# Altium PCB 111.PcbDoc
Units mil, origin at the board's own origin, x right, y up, seen from the top; angles counter-clockwise.
Board outline 6000 x 4000 mil, 2 copper layers (Top Layer, Bottom Layer); 27 components, 29 nets, 115 pads, 117 vias.
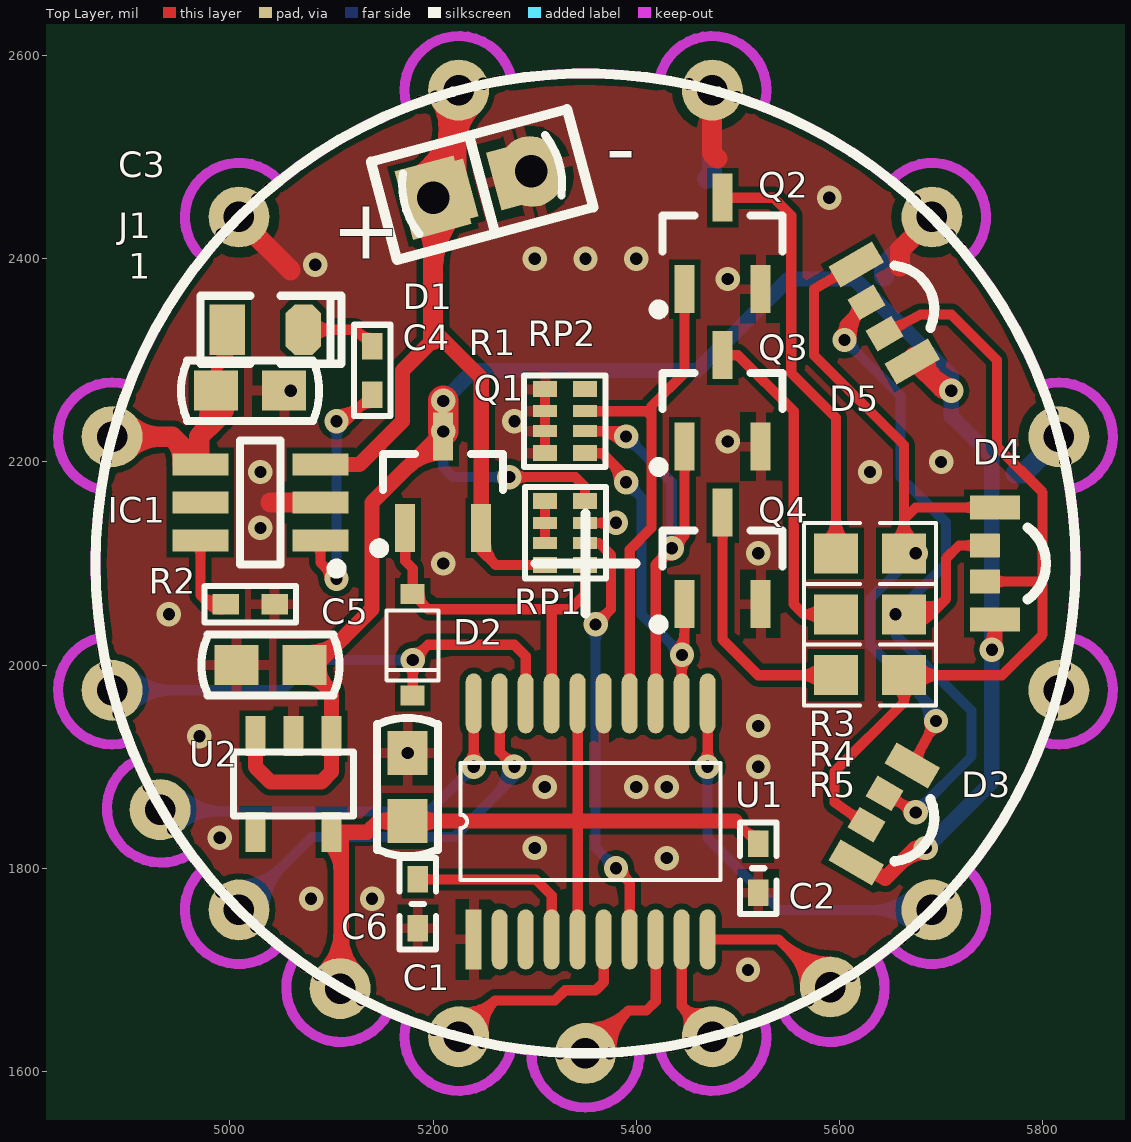
[diagram p0: Top Layer view]
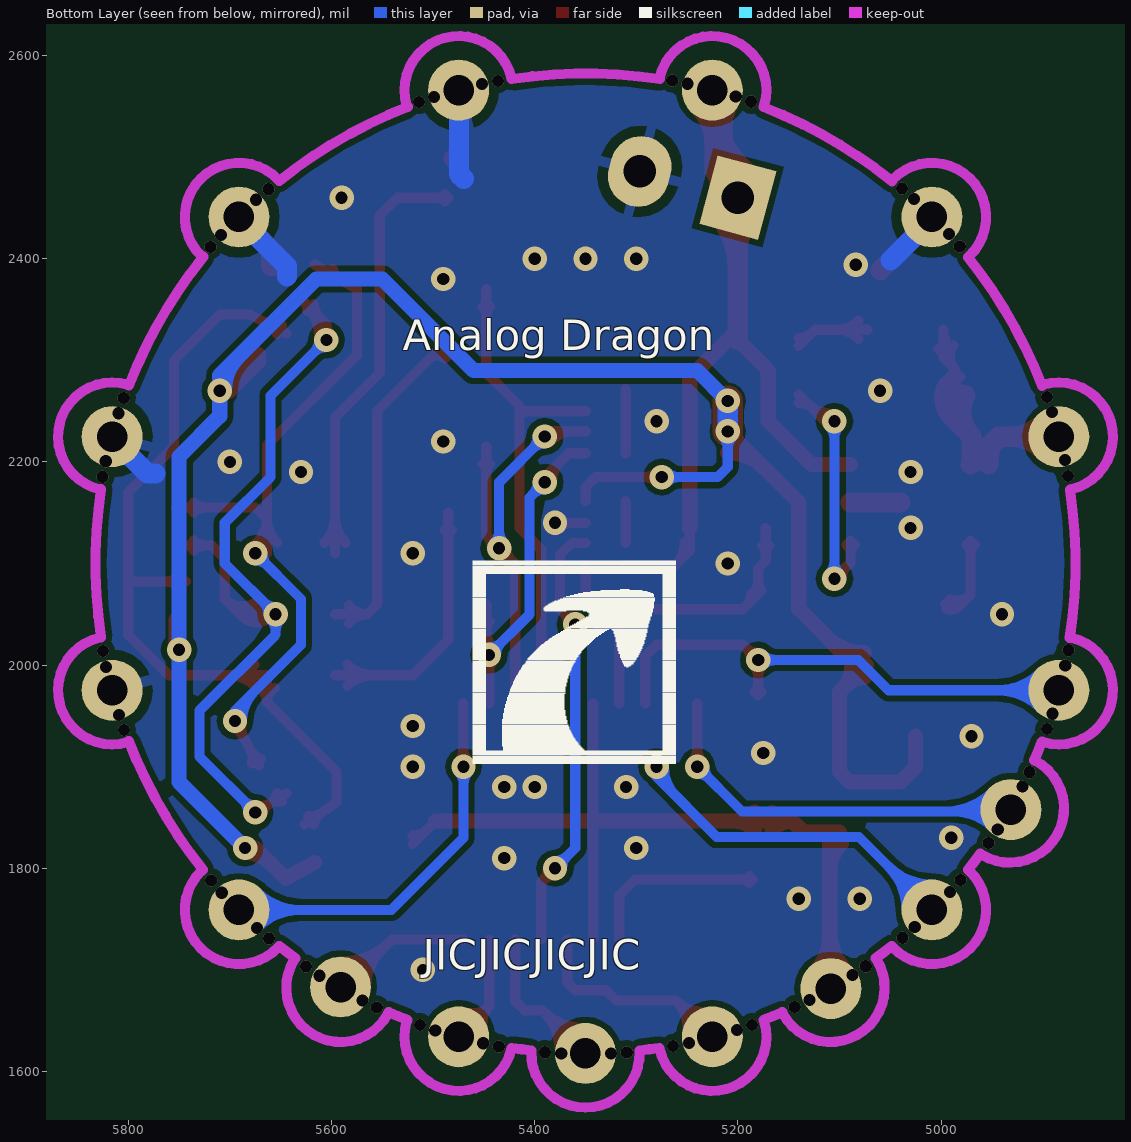
[diagram p1: Bottom Layer view, seen from below]
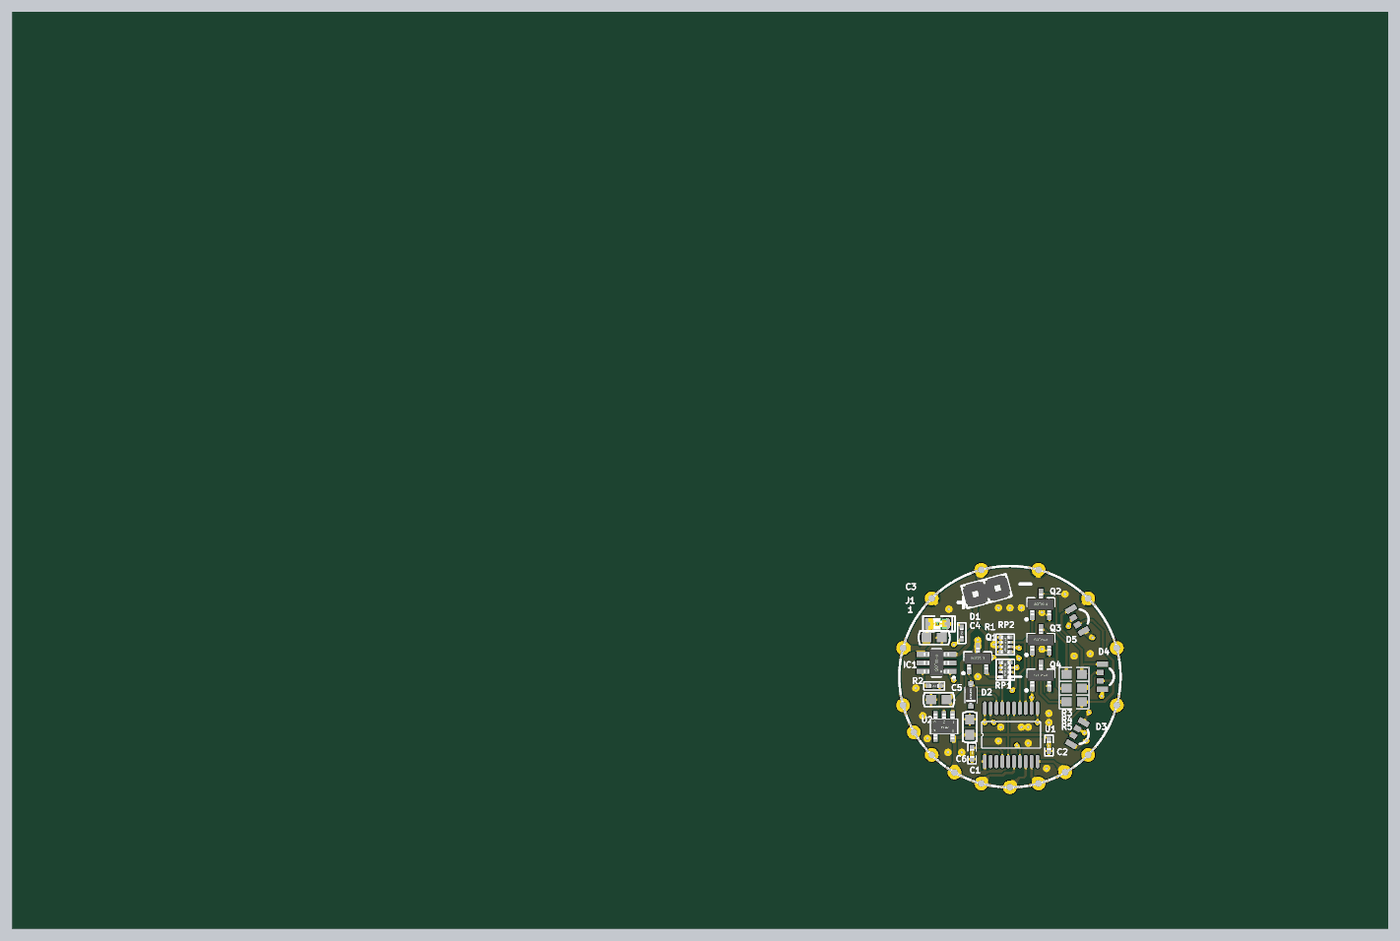
[diagram p2: 3D render of the assembled board from above, using the file's embedded part models]

## Layer stack, top to bottom
Top Layer: signal copper 1.4
Dielectric: dielectric 12.6, FR-4, Dk 4.8
Bottom Layer: signal copper 1.4

## Board outline
1000,1000 7000,1000 7000,5000 1000,5000

## Design rules (kind name [scope] priority, off if disabled: settings)
Clearance [All] p1: gap=6
ComponentClearance [All] p1 off: gap=10 collisioncheckmode=3 verticalgap=10 showdistances=FALSE
Height [All] p1 off: minheight=0 maxheight=1000 prefheight=500
PolygonConnect PolygonConnect_1 [IsVia] p1: connectstyle=Direct reliefconductorwidth=10 reliefentries=4 polygonreliefangle="90 Angle" airgapwidth=10
PolygonConnect [All] p2: connectstyle=Relief reliefconductorwidth=10 reliefentries=4 polygonreliefangle="90 Angle" airgapwidth=10
RoutingVias [All] p1: holewidth=28 width=50 viastyle="Through Hole" minholewidth=28 minwidth=50 maxholewidth=28 maxwidth=50
SolderMaskExpansion [All] p1: expansion=4
Width [All] p1: maxlimit=100 minlimit=1 preferedwidth=10
26 further rules are at their usual default settings.

## Components (designator, comment, footprint, x,y, rotation, side; value= is the part's Value field where it differs from the comment)
1 "LED_Board" LED_KO 5350,2100 r0 top
C1 "104" "C 0402_M" 5185,1765 r270 top
C2 "104" "C 0402_M" 5520,1800 r90 top
C3 "Cap" C-RAD-0805 5248.3,2472.94 r195 top
C4 "Cap" C-RAD-0603 5020,2270 r180 top
C5 "Cap" C-RAD-0603 5040,2000 r0 top
C6 "Cap" C-RAD-0603 5175,1880 r270 top
D1 "红色" "LED 0805R" 5035,2330 r0 top
D2 "1N4148" SOD-323 5180,2070 r270 top
D3 "LED-1204" LED_1204 5650,1850 r60 top
D4 "LED-1204" LED_1204 5760,2100 r90 top
D5 "LED-1204" LED_1204 5650,2350 r120 top
IC1 "TP4057" SOT23-6M 5030,2160 r90 top
J1 "Pin HDR1X2" "Pin HDR1X2/2.54mm-S" 5200,2460 r105 top
Q1 "SI2301" SOT23-3N 5210,2180 r0 top
Q2 "SI2302" SOT23-3N 5485,2415 r0 top
Q3 "SI2302" SOT23-3N 5485,2260 r0 top
Q4 "SI2302" SOT23-3N 5485,2105 r0 top
R1 "1K" "R 0402_M" 5140,2290 r90 top
R2 "1K" "R 0402_M" 5020,2060 r180 top
R3 "Res1" 0603-1 5630,2110 r0 top
R4 "Res1" 0603-1 5630,2050 r0 top
R5 "Res1" 0603-1 5630,1990 r0 top
RP1 "103" RCA-8P4R-0402 5330,2130 r90 top
RP2 "103" RCA-8P4R-0402 5330,2240 r270 top
U1 "STM32F030F4" TSSOP20 5240,1730 r90 top
U2 "ldo3.3v" SOT23-5 5100,1930 r270 top

## Footprints (in the part's own frame and the unit in brackets; to place one, negate y for a bottom-side part, rotate by r counter-clockwise, add the part's x,y. Pads: shape width x height; smd on the part's side, far side on the other; paste and mask are expansions set on the pad)
0603-1 [mm] "贴片带丝印"
  rect 1.1x1 smd: 1(-0.85,0) 2(0.85,0)
  silkscreen extent -1.65,-0.76 1.65,0.76, body extent -1.14,-0.38 1.14,0.38, height 1
"C 0402_M" [mil] "无极性贴片电容"
  rect 26x20 smd: 1(-24,0) 2(24,0)
  silkscreen extent -45,-18 45,18, body extent -20,-10 20,10, height 21
C-RAD-0603 [mm] "贴片电容"
  rect 1.1x1 smd: 1(-0.85,0) 2(0.85,0)
  silkscreen extent -1.73,-0.76 1.73,0.76, body extent -1.14,-0.38 1.14,0.38, height 1
C-RAD-0805 [mm] "贴片电容"
  rect 1.3x1.5 smd: 1(-0.95,0) 2(0.95,0)
  silkscreen extent -2,-0.79 2,0.79, body extent -1.27,-0.64 1.27,0.64, height 0.9
"LED 0805R" [mil] "红色0805LED"
  rect 35x50 smd: 1(-37.41,0)
  oct 35x50 smd: 2(37.4,0)
  silkscreen extent -64,-33 75,33, body extent -39,-25 39,25, height 32
LED_1204 [mm]
  rect 0.6x1.25 smd: 1(-1.4,0.175) 4(1.4,0.175)
  rect 0.6x0.75 smd: 2(-0.45,0.425) 3(0.45,0.425)
  silkscreen extent -0.9,-1.1 0.9,-0.64
LED_KO [mil]
  round 60 hole 30: 1(-465.85,-124.82) 2(-418.69,-242.28) 3(-341.03,-341.03) 4(-241.5,-418.38) 5(-124.82,-465.85) 6(0,-482.28) 7(124.82,-465.85) 8(241.1,-416.88) 9(341.03,-341.03) 10(465.85,-124.82) 11(465.85,124.82) 12(341.03,341.03) 13(124.82,465.85) 14(-124.82,465.85) 15(-341.03,341.03) 16(-465.85,124.82)
  silkscreen extent -482,-482 482,482
"Pin HDR1X2/2.54mm-S" [mil]
  rect 70x60 hole 32: 1(0,0)
  oval 70x60 hole 32: 2(0,-100)
  silkscreen extent -50,-150 50,50, body extent -50,-150 50,50, height 336
"R 0402_M" [mil] "1/16W贴片电阻"
  rect 26x20 smd: 1(-24,0) 2(24,0)
  silkscreen extent -45,-18 45,18, body extent -20,-10 20,10, height 12
RCA-8P4R-0402 [mm] "2mm*1mm*0.45mm(长*宽*厚)"
  rect 0.4x0.6 smd: 1(-0.8,-0.5) 4(0.8,-0.5) 5(0.8,0.5) 8(-0.8,0.5)
  rect 0.3x0.6 smd: 2(-0.25,-0.5) 3(0.25,-0.5) 6(0.25,0.5) 7(-0.25,0.5)
  silkscreen extent -1.14,-1.02 1.15,1.01, body extent -1,-0.5 1,0.5, height 0.45
SOD-323 [mm] "塑封二极管"
  rect 0.5x0.6 smd: A(0,0) K(2.54,0)
  silkscreen extent 0.41,-0.65 2.16,0.65, body extent 0.02,-0.64 2.52,0.62, height 0.9
SOT23-3N [mm] "3x1.3x1mm(长宽高)"
  rect 0.5x1.2 smd: 1(-0.95,-1.143) 2(0.95,-1.143) 3(0,1.143)
  silkscreen extent -1.72,-1.78 1.5,0.7, body extent -1.5,-1.2 1.5,1.2, height 1.05
SOT23-5 [mm]
  rect 1x0.5 smd: 1(0,0) 2(0,-0.95) 3(0,-1.9) 4(2.4,-1.9) 5(2.4,0)
  silkscreen extent 0.4,-2.45 2,0.55, body extent -0.2,-2.4 2.6,0.5, height 1.09
SOT23-6M [mm] "3x1.6x1.1mm(长宽高)"
  rect 0.55x1.4 smd: 1(-0.95,-1.5) 2(0,-1.5) 3(0.95,-1.5) 4(0.95,1.5) 5(0,1.5) 6(-0.95,1.5)
  silkscreen extent -1.78,-2.03 1.55,0.51, body extent -1.5,-1.4 1.5,1.4, height 1.15
TSSOP20 [mm]
  rect 1.5x0.4 smd: 1(0,0)
  oval 1.5x0.4 smd: 2(0,-0.65) 3(0,-1.3) 4(0,-1.95) 5(0,-2.6) 6(0,-3.25) 7(0,-3.9) 8(0,-4.55) 9(0,-5.2) 10(0,-5.85) 11(5.9,-5.85) 12(5.9,-5.2) 13(5.9,-4.55) 14(5.9,-3.9) 15(5.9,-3.25) 16(5.9,-2.6) 17(5.9,-1.95) 18(5.9,-1.3) 19(5.9,-0.65) 20(5.9,0)
  silkscreen extent 1.48,-6.18 4.42,0.33

## Part data
C1 C2: library part C, "无极性贴片电容"
C3 C4 C5 C6: "无极性电容"
D1: library part LED-SMD, "贴片LED"
D2: "高速开关二极管"
D3 D4 D5: "三基色LED"
Q1: "P沟道 20V/2.8A"
Q2 Q3 Q4: "N沟道 20V/3A"
R1 R2: library part R, "贴片电阻"
R3 R4 R5: "贴片电阻"
RP1 RP2: library part R-8P4R, "贴片网络排阻"
U2: library part Component_1

## Via types
v1: diameter 12, hole 12, Top Layer to Bottom Layer, 64 vias
v2: diameter 24, hole 12, Top Layer to Bottom Layer, 53 vias

## Nets (pads, with @x,y where several pads share a name; then routed paths per layer and width w, separated by ;. In a path a pad name is that pad's centre, name@x,y a point inside that pad or via, vN(x,y) a via of type N, cw(c..) or ccw(c..) an arc to the next point about the centre after c; other vN are vias at no path point)
AD: RP1.2 U1.7 | length 534.9
  Top Layer w10: RP1.2 5363.27,2120.16 5375,2108.43 5375,2055 v2(5360,2040) ; v2@5360,2047 ccw(c5360,2063.9) 5371.95,2051.95 ccw(c5383.9,2040) v2@5367,2040 ; v2@5380,1793 cw(c5380,1776.1) 5391.95,1788.05 cw(c5403.9,1800) v2@5387,1800 ; v2(5380,1800) 5393.54,1786.46 U1.7
  Bottom Layer w10: v2@5355.05,2035.05 cw(c5343.1,2023.1) 5360,2023.1 cw(c5376.9,2023.1) v2@5364.95,2035.05 ; v2(5360,2040) 5360,1820 v2(5380,1800) ; v2@5373,1800 ccw(c5356.1,1800) 5368.05,1811.95 ccw(c5380,1823.9) v2@5380,1807
BLUE: Q4.1 RP2.5 U1.12 | length 487.7
  Top Layer w10: RP2.5 5366.5,2208.5 5390,2185 v2(5390,2180) ; 5374.51,2200.49 cw(c5354.03,2180) v2@5383,2180 ; v2@5440.05,2005.05 cw(c5428.76,1993.76) 5444.72,1993.76 ; v2@5440.05,2014.95 ccw(c5421.83,2033.17) 5447.6,2033.17 ; Q4.1@5444.17,2042.8 cw(c5435.91,2034.53) 5447.6,2034.53 cw(c5459.29,2034.53) Q4.1@5451.02,2042.8 ; U1.12 5444.72,2009.72 5447.6,2012.6 Q4.1 ; 5444.72,1992.44 cw(c5462.56,1992.44) v2@5449.95,2005.05
  Bottom Layer w10: v2@5390,2173 cw(c5390,2156.1) 5401.95,2168.05 cw(c5413.9,2180) v2@5397,2180 ; v2(5390,2180) 5405,2165 5405,2050 v2(5445,2010) ; v2@5438,2010 ccw(c5421.1,2010) 5433.05,2021.95 ccw(c5445,2033.9) v2@5445,2017
BLUE3: D3.2 D4.2 D5.2 R5.2 | length 992.2
  Top Layer w10: 5610.24,1854.42 cw(c5600.38,1840.22) D3.2@5617.39,1843.29 ; 5611.21,1853.74 ccw(c5620.11,1866.56) D3.2@5622.88,1851.2 ; D3.2 5595,1865 5595,1895 5663.46,1963.46 ; D5.2 5680,2345 5710,2345 5755,2300 5755,2215 5800,2170 5800,2085 ; D5.2@5648.95,2334.27 ccw(c5653.96,2350.36) 5661.79,2335.44 ; D5.2@5653.43,2325.74 cw(c5668.74,2320.97) 5661.29,2335.17 ; R5.2@5655.67,1977.56 cw(c5646.83,1963.47) 5663.46,1963.47 ; R5.2@5671.26,1977.56 ccw(c5680.09,1963.47) 5663.46,1963.47 ; R5.2@5675.82,1979.62 cw(c5700.89,1954.55) 5700.89,1990 cw(c5700.89,2025.45) R5.2@5675.82,2000.38 ; D4.2 5797.28,2082.28 5800,2085 ; D4.2@5751.04,2077.47 cw(c5762.66,2065.84) 5762.66,2082.28 cw(c5762.66,2098.73) D4.2@5751.04,2087.1 ; 5663.46,1963.46 R5.2 5760,1990 5800,2030 5800,2070 5800,2085
CLK: 1.2 U1.20 | length 592.8
  Top Layer w10: v2@5235.05,1904.95 ccw(c5223.1,1916.9) 5240,1916.9 ccw(c5256.9,1916.9) v2@5244.95,1904.95 ; v2(5240,1900) U1.20
  Bottom Layer w10: 1.2@4932.49,1855.91 5195.91,1855.91 v2(5240,1900) ; 1.2@4941.92,1847.11 cw(c4963.15,1825.88) 4963.15,1855.91 ; 1.2@4941.92,1868.33 ccw(c4971.89,1898.31) 4971.89,1855.91 ; 1.2@4948.99,1840.04 cw(c4987.29,1801.74) 4987.29,1855.91 ; 1.2@4948.99,1875.4 ccw(c4996.04,1922.45) 4996.04,1855.91 ; v2@5233,1900 cw(c5216.1,1900) 5228.05,1888.05 cw(c5240,1876.1) v2@5240,1893
  other v1: 4944.25,1838.18 4919.89,1880.63
DIO: 1.3 U1.19 | length 627.3
  Top Layer w10: U1.19 5265.59,1914.41 v2(5280,1900) ; v2@5273,1900 ccw(c5256.1,1900) 5268.05,1911.95 ccw(c5280,1923.9) v2@5280,1907
  Bottom Layer w10: 1.3 5080.71,1830.71 5220.71,1830.71 5280,1890 v2(5280,1900) ; 1.3@5008.97,1773.97 ccw(c5008.97,1810.19) 5034.58,1784.58 ccw(c5060.19,1758.97) 1.3@5023.97,1758.97 ; 1.3@5008.97,1783.97 ccw(c5008.97,1844.33) 5051.65,1801.65 ccw(c5094.33,1758.97) 1.3@5033.97,1758.97 ; 5260.98,1870.98 ccw(c5231.96,1900) v2@5273,1900 ; 5278.05,1888.05 ccw(c5266.1,1900) v2@5283,1900
  other v1: 5025.84,1742.08 4991.32,1776.78
GND: 1.10 1.11 1.12 1.13 1.15 C1.2 C2.1 C3.1 C4.1 C5.1 C6.1 IC1.2 J1.2 Q2.2 Q3.2 Q4.2 R2.1 RP1.3 RP2.1 RP2.2 RP2.3 RP2.4 U1.1 U1.15 U2.2 | length 647.9
  Top Layer w10: RP2.4 RP2.3 RP2.2 RP2.1 ; RP1.3 5379.84,2139.84 v2(5380,2140) ; 5362.72,2139.84 ccw(c5362.72,2157.28) v2@5375.05,2144.95 ; 5363.48,2139.84 cw(c5363.48,2123.48) v2@5375.05,2135.05
  Top Layer w20: 1.15@5008.66,2439.53 5059.69,2388.5 ; 5040,2160 IC1.2 ; 1.13@5474.51,2564.35 5474.51,2503.68 5479.69,2498.5 ; 5659.37,2392.67 5659.37,2408.19 1.12@5690.71,2439.53
  Bottom Layer w20: 1.15@5008.66,2439.53 5049.69,2398.5 ; 5469.69,2478.5 5474.51,2483.33 1.13@5474.51,2564.35 ; 5643.8,2382.62 5643.8,2392.62 1.12@5690.71,2439.53 ; 5773.19,2188.5 5780.71,2188.5 1.11@5815.54,2223.33
  other v1: 5809.25,1950.98 5822.05,1998.23 5822.23,2200.57 5809.69,2247.89 5708.68,2423.22 4992.08,2424.16 5674.16,2457.92 5026.78,2458.68 5499.02,2559.25 5451.77,2572.05
  other v2: 5510,1700 5080,1770 5140,1770 5430,1810 5300,1820 4990,1830 5310,1880 5400,1880 5430,1880 5520,1900 5175,1913.46 4970,1930 5520,1940 4940,2050 5210,2100 5520,2110 5030,2135 5030,2190 5630,2190 5700,2200 5490,2220 5280,2240 5060,2270 5490,2380 5084,2394 5300,2400 5350,2400 5400,2400 5590,2460
GREEN: Q3.1 RP2.6 U1.13 | length 587.2
  Top Layer w10: RP2.6 5384.84,2230.16 v2(5390,2225) ; RP2.6@5360.65,2230.16 cw(c5360.65,2195.65) v2@5385.05,2220.05 ; U1.13 5419.13,2099.13 5447.6,2127.6 Q3.1 ; v2@5428,2115 cw(c5411.1,2115) 5423.05,2103.05 cw(c5435,2091.1) v2@5435,2108 ; v2@5435,2122 ccw(c5435,2138.9) 5446.95,2126.95 ccw(c5458.9,2115) v2@5442,2115 ; Q3.1@5444.17,2197.8 cw(c5435.91,2189.53) 5447.6,2189.53 cw(c5459.29,2189.53) Q3.1@5451.02,2197.8
  Bottom Layer w10: v2@5390,2218 cw(c5390,2201.1) 5401.95,2213.05 cw(c5413.9,2225) v2@5397,2225 ; v2(5390,2225) 5435,2180 v2(5435,2115) ; v2@5430.05,2119.95 ccw(c5418.1,2131.9) 5435,2131.9 ccw(c5451.9,2131.9) v2@5439.95,2119.95
GREEN3: D3.3 D4.3 D5.3 R4.2 | length 1265
  Top Layer w10: v2@5600.42,2325.29 ccw(c5591.73,2335.32) 5605,2335.32 ccw(c5618.27,2335.32) v2@5609.58,2325.29 ; v2@5602,2319.92 cw(c5630.07,2320.68) 5610.22,2340.54 ; v2(5605,2320) 5605,2335.33 D5.3 ccw(c5662.07,2321.56) v2@5612,2320.19 ; 5611.7,2342.03 ccw(c5598.23,2355.5) D5.3@5617.28,2355.5 ; 5614.31,2344.64 cw(c5624.09,2334.86) D5.3@5624.09,2348.69 ; D3.3 v2(5675,1855) ; D3.3@5648.52,1865.61 cw(c5652.33,1849.87) 5660.77,1863.69 ; D3.3@5653.55,1873.83 ccw(c5669.77,1877.75) 5661.07,1863.51 ; R4.2@5658.02,2043.68 cw(c5662.86,2033.56) R4.2@5666.6,2044.14 ; R4.2@5659.95,2045.05 cw(c5671.9,2033.1) 5671.9,2050 cw(c5671.9,2066.9) R4.2@5659.95,2054.95 ; R4.2@5661.32,2053.02 ccw(c5681.68,2062.76) R4.2@5674.16,2041.47 ; R4.2@5662.43,2045.62 ccw(c5673.78,2062.17) 5687.98,2047.98 ; R4.2 5690,2050 ; R4.2@5668.08,2053.86 ccw(c5680.71,2072.27) 5696.49,2056.49 ; v2@5668.2,1853.36 ccw(c5651.77,1849.39) 5660.58,1863.81 ccw(c5669.39,1878.23) v2@5673.36,1861.8 ; R4.2@5673.74,2062.11 ccw(c5687.63,2082.37) 5705,2065 ; R4.2@5678.37,2043.05 cw(c5690,2036.79) 5690,2050 ; R4.2@5678.37,2056.95 ccw(c5690,2063.21) 5690,2050 ; D4.3@5735.5,2112.9 ccw(c5723.87,2101.27) 5723.87,2117.72 ccw(c5723.87,2134.16) D4.3@5735.5,2122.53 ; D4.3 5717.72,2117.72 5705,2105 5705,2065 ; 5690,2050 5705,2065
  Bottom Layer w10: v2@5605,2313 cw(c5605,2296.1) 5616.95,2308.05 cw(c5628.9,2320) v2@5612,2320 ; v2(5605,2320) 5660,2265 5660,2185 5705,2140 5705,2100 v2(5655,2050) 5655,2030 5730,1955 5730,1910 v2(5675,1855) ; v2@5650.05,2045.05 cw(c5638.1,2033.1) 5655,2033.1 cw(c5671.9,2033.1) v2@5659.95,2045.05 ; v2@5655,2057 ccw(c5655,2073.9) 5666.95,2061.95 ccw(c5678.9,2050) v2@5662,2050 ; v2@5675,1862 ccw(c5675,1878.9) 5686.95,1866.95 ccw(c5698.9,1855) v2@5682,1855
KEY1: 1.5 U1.6 | length 321.2
  Top Layer w10: 1.5 5261.03,1670 5320,1670 5330,1680 5360,1680 5367.95,1687.95 U1.6 ; 1.5@5227.13,1649.02 ccw(c5230.18,1672.16) 5246.68,1655.66 ccw(c5263.19,1639.15) 1.5@5240.05,1636.11 ; 1.5@5228.44,1658.94 ccw(c5233.51,1697.51) 5261.02,1670 ccw(c5288.53,1642.49) 1.5@5249.96,1637.41
  other v1: 5248.23,1627.95 5200.98,1640.75
KEY2: 1.8 U1.10 | length 253.4
  Top Layer w10: U1.10 5540,1730 5570,1700 1.8@5580,1700 ; 5541.22,1728.78 ccw(c5591.1,1778.66) 1.8@5591.1,1708.12 ; 5551.4,1718.6 cw(c5515.93,1683.12) 1.8@5566.1,1683.12 ; 5558.29,1711.71 ccw(c5591.1,1744.52) 1.8@5591.1,1698.12
  other v1: 5569.37,1669.89 5611.82,1694.25
KEY3: 1.9 U1.11 | length 587.6
  Top Layer w10: v2@5465.05,1904.95 ccw(c5452.34,1917.66) 5470.32,1917.66 ; v2(5470,1900) 5470.32,1900.32 U1.11 ; 5470.32,1916.14 ccw(c5486.14,1916.14) v2@5474.95,1904.95
  Bottom Layer w10: v2@5465.05,1895.05 cw(c5453.1,1883.1) 5470,1883.1 cw(c5486.9,1883.1) v2@5474.95,1895.05 ; v2(5470,1900) 5470,1830 5541.03,1758.97 1.9 ; 1.9@5673.35,1741.3 ccw(c5630.67,1698.62) 5630.67,1758.97 ccw(c5630.67,1819.33) 1.9@5673.35,1776.65 ; 1.9@5680.42,1748.37 ccw(c5654.81,1722.76) 5654.81,1758.97 ccw(c5654.81,1795.19) 1.9@5680.42,1769.58
  other v1: 5673.22,1741.32 5707.92,1775.84
LED1: 1.6 U1.8 | length 300.9
  Top Layer w10: 1.6 5392.28,1660 ; 1.6@5350.1,1632.72 ccw(c5350.33,1668.12) 5375.37,1643.09 ccw(c5400.4,1618.05) 1.6@5365,1617.82 ; 1.6@5350.17,1642.72 ccw(c5350.56,1701.72) 5392.28,1660 ; 1.6@5375,1617.88 cw(c5434.01,1618.27) 5392.28,1660 ; U1.8 5419.13,1669.13 5410,1660 5392.28,1660
  other v1: 5324.93,1617.83 5373.87,1617.7
LED2: 1.7 U1.9 | length 158.7
  Top Layer w10: U1.9 5444.72,1664.25 1.7 ; 1.7@5450.78,1640.98 ccw(c5427.94,1647.46) 5444.73,1664.25 ccw(c5461.51,1681.03) 1.7@5467.99,1658.2
  other v1: 5450.57,1627.77 5497.89,1640.31
NetC1_1: C1.1 U1.4 | length 200.5
  Top Layer w10: C1.1 5301,1789 5316.77,1773.23 U1.4 ; C1.1@5188.54,1785.46 cw(c5197.07,1776.93) 5197.07,1789 cw(c5197.07,1801.07) C1.1@5188.54,1792.54
NetD1_2: D1.2 R1.2 | length 136.8
  Top Layer w10: D1.2 5124,2330 R1.2 ; D1.2@5081.24,2321.16 cw(c5102.57,2299.82) 5102.57,2330 cw(c5102.57,2360.18) D1.2@5081.24,2338.84 ; 5126.34,2327.66 ccw(c5140,2341.31) R1.2@5140,2322
NetIC1_1: IC1.1 R1.1 | length 392.2
  Top Layer w10: IC1.1@5084.94,2118.48 cw(c5074.99,2108.53) 5089.06,2108.53 cw(c5103.12,2108.53) IC1.1@5093.18,2118.48 ; IC1.1 5089.06,2100.94 v2(5105,2085) ; v2@5098,2085 ccw(c5081.1,2085) 5093.05,2096.95 ccw(c5105,2108.9) v2@5105,2092 ; v2(5105,2240) 5114,2240 R1.1 ; v2@5105,2247 ccw(c5105,2285.63) R1.1@5132.31,2258.31 ; 5126.34,2252.34 cw(c5140,2238.69) R1.1@5140,2258
  Bottom Layer w10: v2@5100.05,2089.95 ccw(c5088.1,2101.9) 5105,2101.9 ccw(c5121.9,2101.9) v2@5109.95,2089.95 ; v2@5100.05,2235.05 cw(c5088.1,2223.1) 5105,2223.1 cw(c5121.9,2223.1) v2@5109.95,2235.05 ; v2(5105,2085) v2(5105,2240)
NetIC1_6: IC1.6 R2.2 | length 159.2
  Top Layer w10: IC1.6@4966.82,2118.48 cw(c4956.88,2108.53) 4970.94,2108.53 cw(c4985.01,2108.53) IC1.6@4975.06,2118.48 ; IC1.6 4970.94,2069.06 ; 4981.91,2058.09 ccw(c4990.48,2066.67) R2.2@4994.76,2055.32 ; R2.2@4989.46,2056.46 ccw(c4980.93,2047.93) 4980.93,2060 ccw(c4980.93,2072.07) R2.2@4989.46,2063.54 ; R2.2@4991.24,2064.68 cw(c4984.48,2082.59) 4970.95,2069.05 ; R2.2 4980,2060 4970.94,2069.06
NetQ2_3: Q2.3 R3.1 | length 499.5
  Top Layer w10: Q2.3 5535,2460 5552.5,2442.5 5552.5,2287.5 5596.54,2243.46 R3.1 ; Q2.3@5488.42,2456.58 cw(c5496.69,2448.31) 5496.69,2460 cw(c5496.69,2471.69) Q2.3@5488.42,2463.42 ; R3.1@5586.15,2120.38 ccw(c5561.08,2145.45) 5596.54,2145.45 ccw(c5631.99,2145.45) R3.1@5606.92,2120.38
NetQ3_3: Q3.3 R4.1 | length 388.2
  Top Layer w10: Q3.3 5500,2305 5555,2250 5555,2060 5565,2050 ; Q3.3@5488.42,2301.58 cw(c5496.69,2293.31) 5496.69,2305 cw(c5496.69,2316.69) Q3.3@5488.42,2308.42 ; R4.1@5582.87,2041.13 ccw(c5565,2027.58) 5565,2050 ; R4.1@5582.87,2058.87 cw(c5565,2072.42) 5565,2050 ; R4.1 5565,2050
NetQ4_3: Q4.3 R5.1 | length 325.1
  Top Layer w10: Q4.3@5481.58,2132.8 cw(c5473.31,2124.53) 5485,2124.53 cw(c5496.69,2124.53) Q4.3@5488.42,2132.8 ; Q4.3 5485,2025 5520,1990 R5.1 ; R5.1@5584.18,1979.62 ccw(c5559.11,1954.55) 5559.11,1990 ccw(c5559.11,2025.45) R5.1@5584.18,2000.38
NetRP1_5: RP1.5 RP1.6 RP1.7 | length 41.3
  Top Layer w10: RP1.7 RP1.6 RP1.5
PWEN: D2.A Q1.1 RP1.1 U1.17 | length 422.6
  Top Layer w10: Q1.1@5169.17,2117.8 cw(c5160.91,2109.53) 5172.6,2109.53 cw(c5184.29,2109.53) Q1.1@5176.02,2117.8 ; Q1.1 5172.6,2102.4 5180,2095 D2.A 5195,2055 5320,2055 ; D2.A@5176.58,2073.42 ccw(c5168.31,2081.69) 5180,2081.69 ccw(c5191.69,2081.69) D2.A@5183.42,2073.42 ; D2.A@5186.81,2070 ccw(c5203.25,2070) 5191.63,2058.37 ; U1.17 5316.77,2051.77 5320,2055 ; RP1.1 5349.69,2069.69 5335,2055 5320,2055
PWK: 1.1 D2.K U1.18 | length 761.5
  Top Layer w10: v2@5175.05,2000.05 cw(c5163.1,1988.1) 5180,1988.1 cw(c5196.9,1988.1) v2@5184.95,2000.05 ; D2.K@5176.58,1973.42 ccw(c5168.31,1981.69) 5180,1981.69 ccw(c5191.69,1981.69) D2.K@5183.42,1973.42 ; D2.K v2(5180,2005) 5195,2020 5280,2020 5291.18,2008.82 U1.18 ; v2@5180,2012 ccw(c5180,2028.9) 5191.95,2016.95 ccw(c5203.9,2005) v2@5187,2005
  Bottom Layer w10: 1.1 5051.76,1975.18 5081.58,2005 v2(5180,2005) ; 1.1@4894.76,1964.57 cw(c4920.36,1938.96) 4920.36,1975.18 cw(c4920.36,2011.39) 1.1@4894.76,1985.78 ; 1.1@4901.83,1957.5 cw(c4944.51,1914.82) 4944.51,1975.18 cw(c4944.51,2035.53) 1.1@4901.83,1992.85 ; v2@5175.05,2000.05 ccw(c5163.1,1988.1) 5163.1,2005 ccw(c5163.1,2021.9) v2@5175.05,2009.95
  other v1: 4890.31,1952.11 4877.77,1999.43
RED: Q2.1 RP2.7 U1.14 | length 515.8
  Top Layer w10: RP2.7 5410.16,2249.84 5415,2245 ; U1.14 5393.54,2113.54 5415,2135 5415,2245 ; Q2.1@5444.17,2352.8 cw(c5435.91,2344.53) 5447.6,2344.53 cw(c5459.29,2344.53) Q2.1@5451.02,2352.8 ; Q2.1 5447.6,2287.6 5415,2255 5415,2245
RED3: D3.4 D4.4 D5.4 R3.2 | length 1001.8
  Top Layer w10: 5591.08,2379.42 ccw(c5582.63,2393.84) D5.4@5598.8,2389.61 ; 5591.41,2379.61 cw(c5599.58,2365.65) D5.4@5603.67,2381.3 ; D5.4 5575,2370 5575,2305 5663.46,2216.54 5663.46,2143.46 ; R3.2@5653.52,2120.81 ccw(c5632.68,2143.46) 5663.46,2143.46 ; R3.2 5663.46,2143.46 ; R3.2@5663.46,2125.41 ccw(c5684.64,2125.41) R3.2@5673.41,2107.46 ; 5665.99,2132.49 cw(c5646.14,2119.9) R3.2@5668.38,2112.27 ; D3.4@5669.61,1907.7 ccw(c5664.84,1923.43) 5679.34,1915.68 ccw(c5693.84,1907.93) D3.4@5678.11,1903.16 ; D3.4 v2(5695,1945) ; R3.2@5673.41,2120.81 cw(c5694.25,2143.46) 5663.46,2143.46 ; R3.2@5678.71,2115.93 cw(c5695.94,2143.46) 5663.46,2143.46 ; v2@5688.3,1942.97 cw(c5672.13,1938.06) 5687.04,1930.09 cw(c5701.94,1922.13) v2@5697.03,1938.3 ; D4.4@5735.5,2150.3 ccw(c5723.87,2138.67) 5723.87,2155.12 ccw(c5723.87,2171.56) D4.4@5735.5,2159.93 ; D4.4 5675.12,2155.12 5663.46,2143.46
  Bottom Layer w10: v2@5668,2110 cw(c5651.1,2110) 5663.05,2098.05 cw(c5675,2086.1) v2@5675,2103 ; v2(5675,2110) 5630,2065 5630,2020 5695,1955 v2(5695,1945) ; 5675.98,1974.02 cw(c5646.96,1945) v2@5688,1945 ; 5693.05,1956.95 cw(c5681.1,1945) v2@5698,1945
VB: C5.2 D3.1 D4.1 D5.1 Q1.3 RP1.4 U2.1 U2.3 | length 2454.7
  Top Layer w10: v2(5275,2185) 5340,2185 5349.69,2175.31 RP1.4 ; v2@5279.95,2180.05 cw(c5291.9,2168.1) 5291.9,2185 cw(c5291.9,2201.9) v2@5279.95,2189.95
  Top Layer w15: U2.3 5025.2,1899.8 5040,1885 5090,1885 5100,1895 U2.1 5100,1973.46 C5.2 5085,2000 5140,2055 5140,2160 v2(5210,2230) ; C5.2@5075.43,1987.82 cw(c5075.43,1963.15) C5.2@5092.87,1980.59 ; C5.2@5075.43,2012.18 ccw(c5075.43,2064.7) 5112.57,2027.57 ; C5.2@5087.62,2000 ccw(c5121.79,2000) 5097.63,1975.84 ; 5173.94,2193.94 cw(c5210,2157.89) Q1.3@5210,2208.88 ; 5199.55,2219.55 cw(c5210,2209.1) Q1.3@5210,2223.88 ; D3.1 5645,1790 5675,1820 v2(5685,1820) ; 5660.25,1805.25 cw(c5685,1780.49) v2@5685,1815.5 ; D5.1 v2@5700.41,2270 ; D5.1@5672,2305.78 ccw(c5687.72,2304.96) D5.1@5676.59,2293.83 ; 5685.95,2284.46 ccw(c5710,2308.51) v2@5710,2274.5 ; D5.1@5686.98,2304.99 ccw(c5733,2302.59) v2@5700.41,2270 ; 5687.36,2292.62 ccw(c5721.31,2312.22) v2@5711.16,2274.35 ; v2(5710,2270) v2@5700.41,2270 ; v2@5746.82,2018.18 ccw(c5731.63,2033.37) D4.1@5753.11,2033.37 ; v2(5750,2015) 5753.11,2018.11 D4.1
  Top Layer w30: v2(5210,2230) v2(5210,2260)
  Bottom Layer w10: v2@5205.05,2225.05 cw(c5193.1,2213.1) 5210,2213.1 cw(c5226.9,2213.1) v2@5214.95,2225.05 ; v2(5210,2230) 5210,2195 5220,2185 v2(5275,2185) ; v2@5270.05,2180.05 ccw(c5258.1,2168.1) 5258.1,2185 ccw(c5258.1,2201.9) v2@5270.05,2189.95
  Bottom Layer w15: v2(5210,2260) 5240,2290 5460,2290 5550,2380 5615,2380 5710,2285 5710,2245 5750,2205 5750,1885 v2(5685,1820) ; 5691.71,2303.29 cw(c5658.42,2270) v2@5705.5,2270
  Bottom Layer w20: v2(5210,2230) v2(5210,2260)
VBAT: 1.14 C3.2 IC1.3 J1.1 Q1.2 RP1.8 | length 1582
  Top Layer w10: Q1.2 5247.4,2112.6 5261.5,2098.5 ; Q1.2@5252.24,2121.17 ccw(c5283.83,2120.84) 5261.5,2098.5 ; RP1.8 5261.5,2098.5
  Top Layer w15: IC1.3 5127.4,2197.4 5170,2240 5170,2290 5200,2320 ; J1.1@5184.77,2482.49 ccw(c5119,2565.85) 5225.18,2565.85 C3.2@5225.18,2485.18 ; J1.1@5194.06,2470.72 ccw(c5143.42,2534.9) 5225.18,2534.9 ; J1.1@5198.36,2479.86 ccw(c5133.61,2544.6) 1.14@5225.18,2544.6 ; 5200,2330 5247.4,2282.6 Q1.2 ; J1.1 C3.2@5225.18,2485.18 ; J1.1@5203.35,2458.94 ccw(c5167.83,2503.96) 5225.18,2503.96 ; 1.14@5205.69,2554.6 cw(c5158.64,2527.44) 5211.12,2513.38 cw(c5263.58,2499.33) 5236.43,2546.36 ccw(c5249.91,2523.01) 5223.86,2529.99 ; 1.14@5207.99,2551.32 cw(c5170.94,2519.99) 5217.81,2507.43 ; J1.1@5208.96,2469.25 ccw(c5169.83,2508.39) 5225.18,2508.39 ; 1.14@5209.27,2549.94 cw(c5170.86,2511.53) 5225.18,2511.53 cw(c5279.5,2511.53) 1.14@5241.09,2549.94 ; J1.1@5210.98,2483.69 ccw(c5217.16,2493.19) C3.2@5225.18,2485.17 ; 1.14@5219.45,2561.01 cw(c5197.6,2542.54) 5225.24,2535.13 ; J1.1@5220.67,2469.71 cw(c5237.01,2473.34) C3.2@5225.18,2485.18
  Top Layer w20: J1.1@5187.15,2441.03 cw(c5156.13,2410.01) 5200,2410.01 ; 5200,2320 5200,2330 J1.1 ; 5200,2389.98 cw(c5282.67,2389.98) J1.1@5224.21,2448.43 ; 5200,2403.76 cw(c5252.7,2403.76) J1.1@5215.44,2441.03 ; J1.1@5201.92,2448.68 cw(c5186.34,2433.77) 5205.02,2422.98
  other v1: 5202.11,2559.69 5249.43,2572.23
VBUS: 1.16 C4.2 D1.1 IC1.4 | length 551.7
  Top Layer w10: C4.2@4981.17,2283.67 ccw(c4978.09,2291.53) 4986.54,2291.53 ; C4.2 4986.54,2291.54 ; D1.1@4987.83,2314.7 cw(c4974.23,2303.84) 4986.54,2291.54 ; C4.2@4991.9,2283.67 cw(c4994.98,2291.53) 4986.54,2291.53 ; D1.1@4992.16,2311.24 cw(c4987.99,2302.59) 4997.59,2302.59 ; 4994.44,2299.44 ccw(c4983.02,2310.86) D1.1@4995.64,2320.94 ; D1.1 4997.59,2302.59 ; D1.1@5003.02,2311.24 ccw(c5007.19,2302.59) 4997.59,2302.59 ; 4986.54,2291.54 4997.59,2302.59
  Top Layer w20: 1.16 4943.52,2224.82 ; 1.16@4898.29,2210.68 cw(c4932.43,2176.54) 4932.43,2224.82 cw(c4932.43,2273.11) 1.16@4898.29,2238.97 ; IC1.4@4953.39,2197.48 ccw(c4919.35,2200.65) 4943.52,2224.82 ; IC1.4 IC1.4@4970,2198.35 ; C4.2@4976.02,2265.44 cw(c4945.72,2249.28) 4970,2225 ; C4.2@4979.69,2263.15 cw(c4963.15,2246.62) 4986.54,2246.62 cw(c5009.92,2246.62) C4.2@4993.38,2263.15 ; C4.2 4986.54,2241.54 4970,2225 ; 4989.09,2244.09 ccw(c4970.62,2262.56) C4.2@4993.67,2274.85 ; 4943.52,2224.82 IC1.4@4970,2198.35 ; IC1.4@4970,2198.35 4970,2225
  other v1: 4877.95,2201.77 4890.75,2249.02
VCC3: 1.4 C2.2 C6.2 U1.5 U1.16 U2.5 | length 1048.9
  Top Layer w10: U1.5 U1.16 ; 5497.46,1846.54 C2.2 ; 5506.34,1837.66 ccw(c5520,1851.31) C2.2@5520,1832
  Top Layer w15: 1.4@5092.59,1697.53 ccw(c5051.33,1738.8) 5109.68,1738.8 ; U2.5@5098.34,1824.01 cw(c5070.97,1796.64) 5109.68,1796.64 ; U2.5@5108.95,1834.62 cw(c5107.18,1832.85) U2.5@5109.68,1832.85 ; 1.4@5109.68,1679.81 5109.68,1825.83 U2.5 5135.51,1835.51 5146.54,1846.54 ; 5109.68,1733.09 ccw(c5159.97,1733.09) 1.4@5124.41,1697.53 ; C6.2@5166.18,1838.12 ccw(c5146.54,1819.38) 5146.54,1846.54 ; C6.2@5166.18,1854.95 cw(c5146.54,1873.69) 5146.54,1846.54 ; C6.2@5183.62,1837.92 cw(c5204.42,1817.12) 5204.42,1846.54 cw(c5204.42,1875.95) C6.2@5183.62,1855.15 ; 5497.46,1846.54 C6.2 5146.54,1846.54
  other v1: 5129.52,1670.38 5087.2,1694.96
pads on no net: IC1.5 RP2.8 U1.2 U1.3 U2.4
copper on no net:
  other v1: 5309.39,1618.76 5389.85,1618.92 5263.98,1625 5435.33,1624.65 5186.22,1645.67 5513,1645.63 5143.97,1663.45 5555.45,1662.93 5625.05,1703.3 5074.21,1703.54 5661.57,1731 5038,1731.65 4981,1788.43 5718.35,1788 4953.3,1824.95 4912.93,1894.55 5804.33,1936.22 4895.63,1937 5825,2013.98 4874.65,2014.67 5825.35,2185.33 4875,2186.02 5804.37,2263 4895.67,2263.78 4981.65,2412 5719,2411.57 5662,2468.35 5038.43,2469 5187,2554.37 5513.78,2554.33 5264.67,2575.35 5436.02,2575

## Polygon pours and split planes (outlines as drawn)
GND on Bottom Layer "Top Overlay-No Net" (solid, remove dead copper, pour order 4): 4800,2640 5880,2640 5880,1540 4800,1540
GND on Top Layer "Top Overlay-No Net" (solid, remove dead copper, pour order 3): 4790,2640 5890,2640 5890,1540 4790,1540

## Keep-outs
Keep-Out Layer:
  lines w10: 4871.68,2026.99 ccw(c4884.15,1975.18) 4899.26,1924.07 ; 4871.68,2173.01 cw(c4884.15,2224.82) 4899.26,2275.93 ; 4873.24,2172.77 ccw(c5350,2100) 4873.33,2026.64 ; 4900.51,2274.8 cw(c5350,2100) 4973.5,2401.4 ; 4900.73,1924.64 ccw(c5350,2100) 4908.32,1906.32 ; 4906.87,1905.68 ccw(c4932.33,1858.86) 4960.15,1813.4 ; 4961.42,1814.33 ccw(c5350,2100) 4973.5,1798.6 ; 4972.27,1797.61 ccw(c5008.97,1758.97) 5047.61,1722.27 ; 4972.27,2402.39 cw(c5008.97,2441.03) 5047.61,2477.73 ; 5048.13,2476.13 cw(c5350,2100) 5174.64,2549.27 ; 5048.6,1723.5 ccw(c5350,2100) 5064.33,1711.42 ; 5063.4,1710.15 ccw(c5108.86,1682.33) 5155.68,1656.87 ; 5156.32,1658.32 ccw(c5350,2100) 5174.64,1650.73 ; 5174.07,1649.26 ccw(c5225.18,1634.15) 5276.99,1621.68 ; 5174.07,2550.74 cw(c5225.18,2565.85) 5276.99,2578.32 ; 5276.64,2576.67 cw(c5350,2100) 5422.77,2576.76 ; 5277.23,1623.24 ccw(c5350,2100) 5296.89,1620.65 ; 5296.72,1619.08 ccw(c5350,1617.72) 5403.28,1619.08 ; 5403.11,1620.65 ccw(c5350,2100) 5422.77,1623.24 ; 5423.01,1621.68 ccw(c5474.82,1634.15) 5525.93,1649.26 ; 5423.01,2578.32 cw(c5474.82,2565.85) 5525.93,2550.74 ; 5524.8,2549.49 cw(c5350,2100) 5651.4,2476.5 ; 5525.36,1650.73 ccw(c5350,2100) 5543.68,1658.32 ; 5544.32,1656.87 ccw(c5591.14,1682.33) 5636.6,1710.15 ; 5635.67,1711.42 ccw(c5350,2100) 5651.4,1723.5 ; 5652.39,1722.27 ccw(c5691.03,1758.97) 5727.73,1797.61 ; 5652.39,2477.73 cw(c5691.03,2441.03) 5727.73,2402.39 ; 5726.13,2401.87 cw(c5350,2100) 5799.27,2275.36 ; 5726.5,1798.6 ccw(c5350,2100) 5799.49,1925.2 ; 5800.74,1924.07 ccw(c5815.85,1975.18) 5828.32,2026.99 ; 5800.74,2275.93 cw(c5815.85,2224.82) 5828.32,2173.01 ; 5826.67,2173.36 cw(c5350,2100) 5826.76,2027.23

## Silkscreen, mask and mechanical layers (free items; w line width, h text height)
Top Overlay:
  text "-" at 5370,2480 h60
  text "+" at 5100,2400 h60
Bottom Overlay:
  drawing of 572 lines, arcs and shapes, not listed
  text "Analog Dragon" at 5529.61,2309.68 h30
  text "JICJICJICJIC" at 5510,1700 h30